# EAGLE board Net Widget (EAGLE 7.1.0)
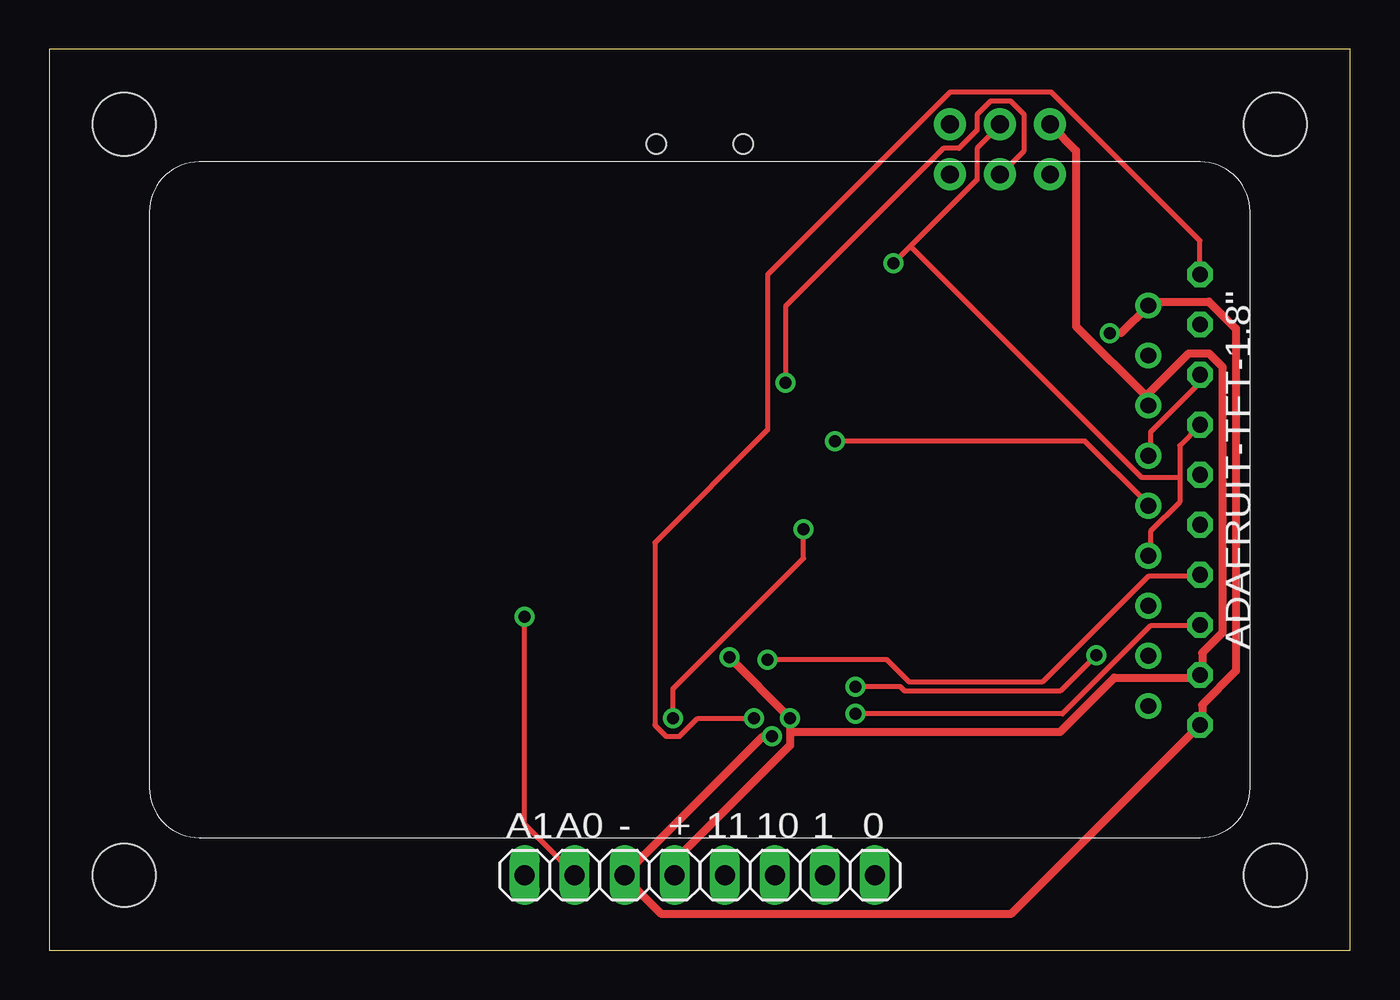
[diagram p0: board, top side]
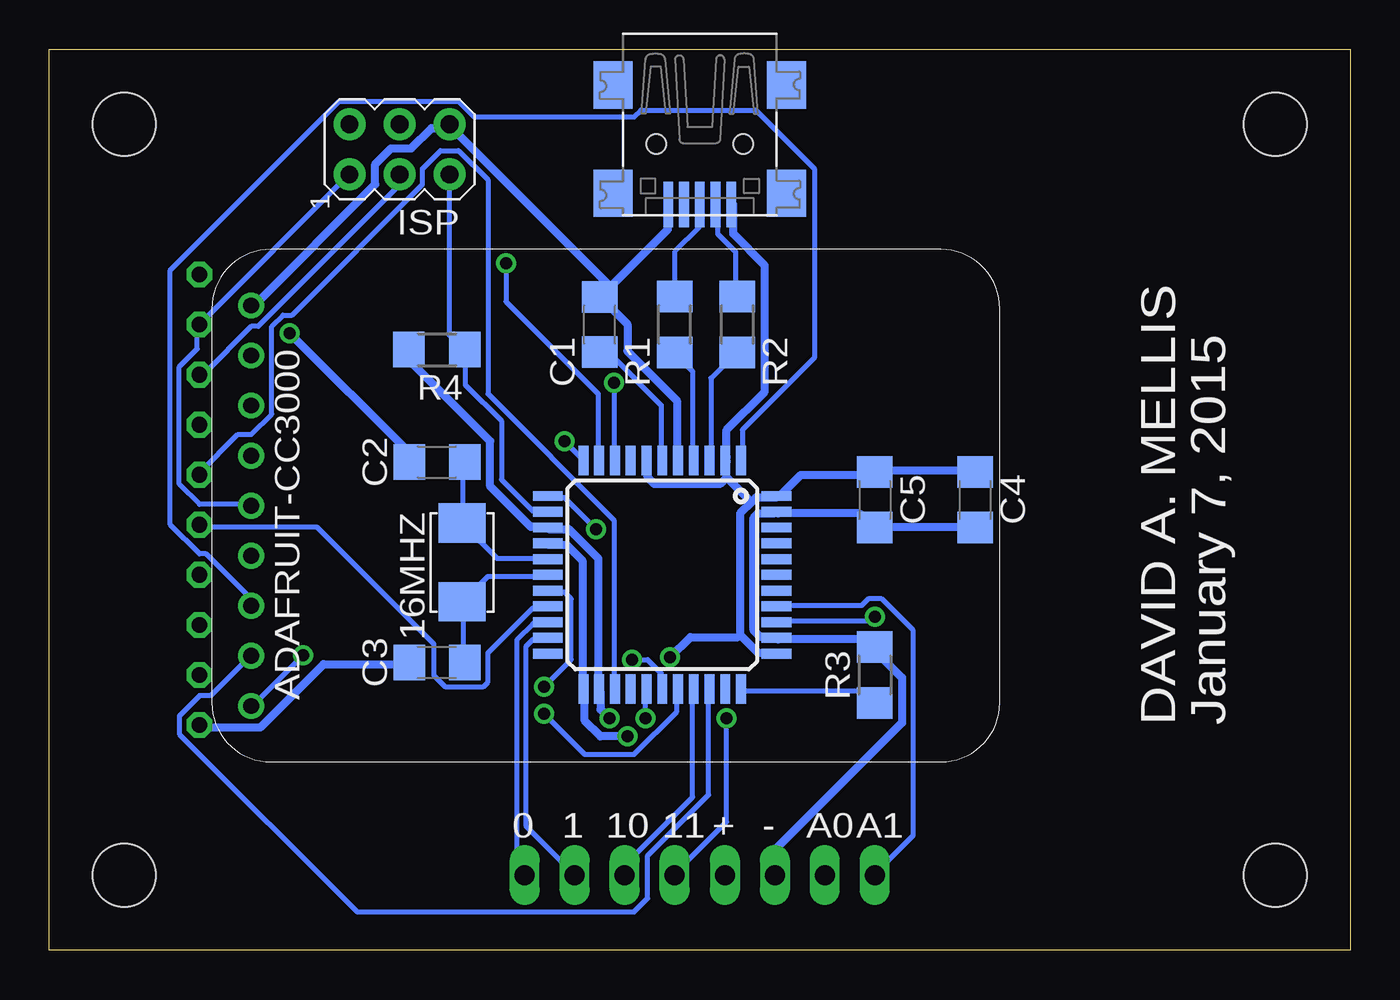
[diagram p1: board, bottom side, seen from below]

Size 66.04 x 45.72 mm. Coordinates in mm from the lower left corner, seen from the top.
Outline: 0,0 66.04,0 66.04,45.72 0,45.72 0,0
Copper layers (1*16): Top 0.035mm / dielectric 1.5mm / Bottom 0.035mm
Design rules "default": minimum track width 10mil, minimum drill 24mil, track to track 8mil, track to pad 8mil, pad to pad 8mil, via to via 8mil, smd to smd 8mil, copper to edge 40mil, drill to drill 8mil, minimum pad ring 10mil, minimum via ring 8mil, stop-mask expansion 4mil, vias tented up to drill 0mil, thermal gap 10mil
Net classes: 1 power: width 0.406 mm
Holes 3.2 mm at 3.81,3.81 3.81,41.91 62.23,41.91 62.23,3.81
tRestrict: area 40,14 to 48.9,25.4; area 30.5,24.1 to 34.9,38.7
bRestrict: area 30.5,31.1 to 34.9,32.4

## Footprints (pad centres in the part's own frame; a part is rotated, then mirrored left to right if it is on the bottom)
2-SMD-5X3MM = smd 2 x 2.4: P$1 -2,0; P$2 2,0
C1206 = smd 1.6 x 1.8: 1 -1.4,0; 2 1.4,0
USB-MINIB = smd 0.5 x 2.308: D+ 0,4.064; D- -0.8,4.064; GND 1.6,4.064; ID 0.8,4.064; VBUS -1.6,4.064 | smd 2 x 2.4: GND1 -4.4,-2; GND2 -4.4,3.5; GND3 4.4,3.5; GND4 4.4,-2 | hole 1: -2.2,1; 2.2,1
AVRISP = drill 0.9 pad 1.626: 1 -1.27,2.54; 2 1.27,2.54; 3 -1.27,0; 4 1.27,0; 5 -1.27,-2.54; 6 1.27,-2.54
1X02 = drill 1.016 long: 1 -1.27,0; 2 1.27,0
R1206 = smd 1.6 x 1.803: 1 -1.422,0; 2 1.422,0
TQFP44 = smd 1.5 x 0.5: 1 -5.8,4; 2 -5.8,3.2; 3 -5.8,2.4; 4 -5.8,1.6; 5 -5.8,0.8; 6 -5.8,0; 7 -5.8,-0.8; 8 -5.8,-1.6; 9 -5.8,-2.4; 10 -5.8,-3.2; 11 -5.8,-4; 23 5.8,-4; 24 5.8,-3.2; 25 5.8,-2.4; 26 5.8,-1.6; 27 5.8,-0.8; 28 5.8,0; 29 5.8,0.8; 30 5.8,1.6; 31 5.8,2.4; 32 5.8,3.2; 33 5.8,4 | smd 0.5 x 1.5: 12 -4,-5.8; 13 -3.2,-5.8; 14 -2.4,-5.8; 15 -1.6,-5.8; 16 -0.8,-5.8; 17 0,-5.8; 18 0.8,-5.8; 19 1.6,-5.8; 20 2.4,-5.8; 21 3.2,-5.8; 22 4,-5.8; 34 4,5.8; 35 3.2,5.8; 36 2.4,5.8; 37 1.6,5.8; 38 0.8,5.8; 39 0,5.8; 40 -0.8,5.8; 41 -1.6,5.8; 42 -2.4,5.8; 43 -3.2,5.8; 44 -4,5.8
ADAFRUIT-CC3000-BREAKOUT = drill 0.8: P1 2.84,2; P2 5.38,2; P3 7.92,2; P4 10.46,2; P5 13,2; P6 15.54,2; P7 18.08,2; P8 20.62,2; P9 23.16,2
ADAFRUIT-TFT1.8-BREAKOUT = drill 0.8 octagon: P$1 -25.4,-11.43; P$2 -25.4,-8.89; P$3 -25.4,-6.35; P$4 -25.4,-3.81; P$5 -25.4,-1.27; P$6 -25.4,1.27; P$7 -25.4,3.81; P$8 -25.4,6.35; P$9 -25.4,8.89; P$10 -25.4,11.43

## Placement (x,y rotation side)
16MHZ  CRYSTAL  [2-SMD-5X3MM]  45.09,19.68 270 bottom
C1  1uF  [C1206]  38.1,31.75 90 bottom
C2  18pF  [C1206]  46.35,24.77 0 bottom
C3  18pF  [C1206]  46.35,14.61 0 bottom
C4  10uF  [C1206]  19.05,22.86 270 bottom
C5  0.1uF  [C1206]  24.13,22.86 270 bottom
CN1  [USB-MINIB]  33.02,41.91 180 bottom
ISP  AVRISP-6  [AVRISP]  48.26,40.64 90 bottom
JP1  [1X02]  40.64,3.81 0 top
JP2  [1X02]  25.4,3.81 0 top
JP3  [1X02]  35.56,3.81 0 top
JP4  [1X02]  30.48,3.81 180 top
R1  22  [R1206]  34.29,31.75 270 bottom
R2  22  [R1206]  31.11,31.75 270 bottom
R3  10K  [R1206]  24.13,13.97 90 bottom
R4  10K  [R1206]  46.35,30.48 180 bottom
U$1  ATMEGA32U4-AU  [TQFP44]  34.92,19.05 270 bottom
U$2  ADAFRUIT-CC3000-BREAKOUT  [ADAFRUIT-CC3000-BREAKOUT]  57.78,35.56 270 bottom
U$3  ADAFRUIT-TFT1.8-BREAKOUT  [ADAFRUIT-TFT1.8-BREAKOUT]  33.02,22.86 180 top

## Library data of the parts
16MHZ = fab
C1-C5 R1-R4 = rcl
CN1 ISP U$1 = adafruit
JP1-JP4 = pinhead
U$2 U$3 = Weather Widget

## Nets
3V3: U$2.P2
A0: JP2.2 U$1.36
A1: JP2.1 U$1.37
CARD_CS: U$1.19 U$3.P$6
CS: U$1.1 U$2.P7
D0: JP1.2 U$1.20
D1: JP1.1 U$1.21
D10: JP3.2 U$1.30
D11: JP3.1 U$1.12
D+: R1.2 U$1.4
D-: R2.2 U$1.3
D/C: U$1.28 U$3.P$7
GND [power]: C1.2 C2.1 C3.1 C4.2 C5.2 CN1.GND ISP.6 JP4.2 R3.2 U$1.5 U$1.15 U$1.23 U$1.35 U$1.43 U$2.P1 U$3.P$10
IRQ: U$1.18 U$2.P9
LITE: U$1.27 U$3.P$1
MISO: ISP.1 U$1.11 U$2.P5 U$3.P$2
MOSI: ISP.4 U$1.10 U$2.P6 U$3.P$4
N$2: CN1.D+ R1.1
N$3: CN1.D- R2.1
N$4: C1.1 U$1.6
N$5: R3.1 U$1.33
N$6: 16MHZ.P$2 C3.2 U$1.17
N$7: 16MHZ.P$1 C2.2 U$1.16
RESET: ISP.5 R4.1 U$1.13
SCK: ISP.3 U$1.9 U$2.P4 U$3.P$3
TFT_CS: U$1.25 U$3.P$5
TFT_RESET: U$1.29 U$3.P$8
VBEN: U$1.31 U$2.P8
VCC [power]: C4.1 C5.1 CN1.VBUS ISP.2 JP4.1 R4.2 U$1.2 U$1.7 U$1.14 U$1.24 U$1.34 U$1.44 U$2.P3 U$3.P$9

## Tracks (layer width: path | path; a pad name or v marks a point on that pad's centre or on a via)
A0  (via drill 0.61)
  Top 0.254: v24.12,16.92 24.12,6.4 26.63,3.89 JP2.2
  Bottom 0.254: v24.12,16.92 24.35,16.69 29.03,16.69 U$1.36
A1
  Bottom 0.254: U$1.37 29.03,17.49 24.8,17.49 24.46,17.83 23.77,17.83 22.17,16.23 22.17,5.83 24.12,3.89 JP2.1
CARD_CS
  Bottom 0.254: U$1.19 40.8,17.37 41.49,17.37 43.78,15.09 43.78,13.6 44.01,13.37 45.95,13.37 46.52,13.95 46.52,15.54 52.46,21.49 58.41,21.49 U$3.P$6
CS
  Bottom 0.254: U$1.1 30.86,24.92 30.86,26.4 27.2,30.06 27.2,39.66 30.18,42.63 36.01,42.63 36.35,42.29 44.46,42.29 45.26,43.09 51.32,43.09 59.89,34.52 59.89,21.6 58.41,20.12 58.06,20.12 55.89,17.95 55.89,17.49 U$2.P7
D0
  Bottom 0.254: U$1.20 40.8,16.57 41.49,16.57 42.29,15.77 42.29,4.23 41.95,3.89 JP1.2
D1
  Bottom 0.254: U$1.21 40.8,15.77 41.49,15.77 41.83,15.43 41.83,6.29 39.43,3.89 JP1.1
D10
  Bottom 0.254: U$1.30 33.38,13.14 33.38,7.77 36.8,4.34 36.8,3.89 JP3.2
D11  (via drill 0.61)
  Top 0.254: v38.29,21.37 38.29,19.89 31.66,13.26 v31.66,11.77
  Bottom 0.254: v38.29,21.37 39.89,22.97 40.69,22.97 U$1.12 | v31.66,11.77 31.66,6.51 34.29,3.89 JP3.1
D+
  Bottom 0.254: U$1.4 33.38,24.92 33.38,29.38 34.29,30.29 R1.2
D-
  Bottom 0.254: U$1.3 32.46,24.92 32.46,29.03 31.2,30.29 R2.2
D/C  (via drill 0.61)
  Top 0.254: v36.46,14.74 42.52,14.74 43.66,13.6 50.41,13.6 55.78,18.97 58.41,18.97 U$3.P$7
  Bottom 0.254: v36.46,14.74 35.66,14.74 34.98,14.06 34.98,13.26 U$1.28
GND  (via drill 0.61)
  Top 0.406: v36.69,10.86 36.23,10.86 29.26,3.89 JP4.2 29.26,3.66 31.09,1.83 48.81,1.83 58.29,11.32 U$3.P$10 58.52,11.43 58.52,12.46 60.24,14.17 60.24,31.55 58.86,32.92 55.78,32.92 U$2.P1 55.78,32.69 54.41,31.32 v53.84,31.32
  Bottom 0.406: C4.2 19.09,21.49 24,21.49 C5.2 24.23,21.49 24.92,22.17 29.03,22.17 U$1.43 29.26,22.17 30.06,22.17 30.29,21.95 30.29,16.23 29.95,15.89 29.26,15.89 U$1.35 29.03,15.77 24.57,15.77 24.23,15.43 R3.2 24.12,15.2 22.75,13.83 22.75,11.54 29.15,5.14 29.15,3.89 JP4.2 | U$1.15 40.69,20.57 39.78,20.57 38.98,19.77 38.98,13.26 U$1.23 38.86,13.14 38.86,11.66 38.06,10.86 v36.69,10.86 | U$1.5 34.18,24.92 34.18,27.89 36.69,30.4 36.69,31.77 38.06,33.15 C1.2 | CN1.GND 34.63,37.83 34.63,36.58 37.95,33.26 C1.2 | C1.2 37.6,33.72 45.72,41.83 ISP.6 45.83,41.72 46.63,41.72 47.66,40.69 48.69,40.69 49.49,39.89 49.49,38.86 55.55,32.8 55.78,32.8 U$2.P1 | C3.1 47.78,14.52 52.12,14.52 55.32,11.32 58.29,11.32 58.41,11.43 U$3.P$10 | v53.84,31.32 47.78,25.26 47.78,24.8 C2.1
IRQ  (via drill 0.61)
  Top 0.254: v40.92,13.37 43.2,13.37 43.43,13.14 51.32,13.14 v53.15,14.97
  Bottom 0.254: v40.92,13.37 39.55,14.74 39.55,17.83 39.89,18.17 40.69,18.17 U$1.18 | v53.15,14.97 55.78,12.34 U$2.P9
LITE  (via drill 0.61)
  Top 0.254: v35.78,11.77 32.92,11.77 32,10.86 31.32,10.86 30.75,11.43 30.75,20.69 36.46,26.4 36.46,34.29 45.72,43.55 50.86,43.55 58.41,36.01 58.41,34.29 U$3.P$1
  Bottom 0.254: v35.78,11.77 35.78,13.14 U$1.27
MISO  (via drill 0.61)
  Top 0.254: v39.89,25.83 52.58,25.83 55.78,22.63 U$2.P5
  Bottom 0.254: ISP.1 50.86,39.32 58.41,31.77 U$3.P$2 58.52,31.66 58.52,30.52 59.44,29.6 59.44,23.66 58.41,22.63 55.89,22.63 U$2.P5 | v39.89,25.83 38.98,24.92 U$1.11
MOSI  (via drill 0.61)
  Top 0.254: 57.38,24 57.38,25.6 58.41,26.63 U$3.P$4 | 57.38,24 57.38,22.75 55.89,21.26 55.89,20.12 U$2.P6 | 43.72,35.72 47.09,39.09 47.09,40.69 48.23,41.83 ISP.4 | 43.72,35.72 v42.86,34.86 | 57.38,24 55.44,24 43.72,35.72
  Bottom 0.254: v42.86,34.86 42.86,32.92 38.18,28.23 38.18,24.92 U$1.10
N$2
  Bottom 0.254: R1.1 34.29,35.43 33.03,36.69 33.03,37.83 CN1.D+
N$3
  Bottom 0.254: R2.1 31.2,33.26 31.2,35.43 32.12,36.35 32.12,37.83 CN1.D-
N$4
  Bottom 0.254: U$1.6 34.98,24.92 34.98,27.66 37.6,30.29 38.06,30.29 C1.1
N$5
  Bottom 0.254: U$1.33 30.86,13.14 24.8,13.14 24.23,12.57 R3.1
N$6
  Bottom 0.254: U$1.17 40.8,18.97 43.78,18.97 45.03,17.72 16MHZ.P$2 45.03,17.6 45.03,14.63 C3.2
N$7
  Bottom 0.254: U$1.16 40.8,19.89 43.32,19.89 45.03,21.6 16MHZ.P$1 45.03,21.72 45.03,24.69 C2.2
RESET
  Bottom 0.254: U$1.13 40.8,22.29 41.49,22.29 43.09,23.89 43.09,26.86 44.92,28.69 44.92,30.4 R4.1 45.03,30.52 45.72,31.2 ISP.5
SCK  (via drill 0.61)
  Top 0.254: U$2.P4 55.89,25.15 55.89,26.29 58.41,28.8 58.41,29.15 U$3.P$3 | v37.38,28.8 37.38,32.69 45.38,40.69 46.18,40.69 47.09,41.6 47.09,42.41 47.78,43.09 48.81,43.09 49.49,42.41 49.49,40.58 48.35,39.43 ISP.3
  Bottom 0.254: v37.38,28.8 37.38,24.92 U$1.9 | U$3.P$3 58.41,29.26 58.18,29.26 55.78,31.66 55.44,31.66 48.35,38.75 48.35,39.32 ISP.3
TFT_CS
  Bottom 0.254: U$1.25 37.38,13.26 37.38,21.83 43.78,28.23 43.78,39.09 45.26,40.58 46.18,40.58 47.09,39.66 47.09,38.86 53.72,32.23 54.18,32.23 54.75,31.66 54.75,27.2 55.78,26.18 56.46,26.18 58.41,24.23 U$3.P$5
TFT_RESET  (via drill 0.61)
  Top 0.254: v40.92,12 51.44,12 55.89,16.46 58.41,16.46 U$3.P$8
  Bottom 0.254: v40.92,12 38.86,9.94 36.35,9.94 34.18,12.12 34.18,13.14 U$1.29
VBEN
  Bottom 0.254: U$1.31 32.58,13.14 32.58,7.89 35.66,4.8 35.66,2.63 36.35,1.94 50.41,1.94 59.44,10.97 59.44,11.89 58.41,12.92 57.84,12.92 55.89,14.86 U$2.P8
VCC  (via drill 0.61)
  Top 0.406: ISP.2 50.86,41.83 52.12,40.58 52.12,31.66 55.78,28 55.78,27.66 U$2.P3 55.78,28.23 57.84,30.29 58.86,30.29 59.55,29.6 59.55,16.12 58.52,15.09 58.52,14.06 U$3.P$9 58.29,13.83 54.06,13.83 51.32,11.09 37.6,11.09 | 37.6,11.09 v37.6,11.77 v34.52,14.86 | 37.6,11.09 37.6,10.4 31.77,4.57 31.77,3.89 JP4.1
  Bottom 0.406: C4.1 19.09,24.35 24.12,24.35 C5.1 24.23,24.12 27.89,24.12 28.92,23.09 U$1.44 29.15,22.97 30.18,22.97 30.4,22.75 | 30.98,16 30.06,15.09 29.15,15.09 U$1.34 | 30.98,16 30.98,22.17 30.4,22.75 | 31.66,24 31.66,24.8 U$1.2 31.66,25.03 31.66,26.4 29.72,28.35 29.72,34.75 31.32,36.35 31.32,37.83 CN1.VBUS | 30.4,22.75 31.66,24 | 31.66,24 32,23.66 35.32,23.66 35.66,24 35.66,24.8 U$1.7 | R4.2 47.66,30.4 47.66,29.83 43.66,25.83 43.66,23.55 41.6,21.49 40.92,21.49 U$1.14 40.69,21.37 39.66,21.37 38.18,19.89 38.18,13.26 U$1.24 38.06,13.14 38.06,12.23 v37.6,11.77 | v34.52,14.86 33.49,15.89 31.09,15.89 30.98,16

## Text on the board
tNames: ADAFRUIT-TFT-1.8" | A1 | A0 | - | + | 11 | 10 | 1 | 0
bNames: ADAFRUIT-CC3000 | January 7, 2015 | DAVID A. MELLIS | A1 | A0 | - | + | 11 | 10 | 1 | 0